# Altium PCB Mis - Coin Battery CR2032.PcbDoc
Units mm, origin at the board's own origin, x right, y up, seen from the top; angles counter-clockwise.
Board outline 31.83 x 27.7 mm, 2 copper layers (Top Layer, Bottom Layer); 3 components, 2 nets, 5 pads, 0 vias.
Unrouted connection lines stored in the file: 1.
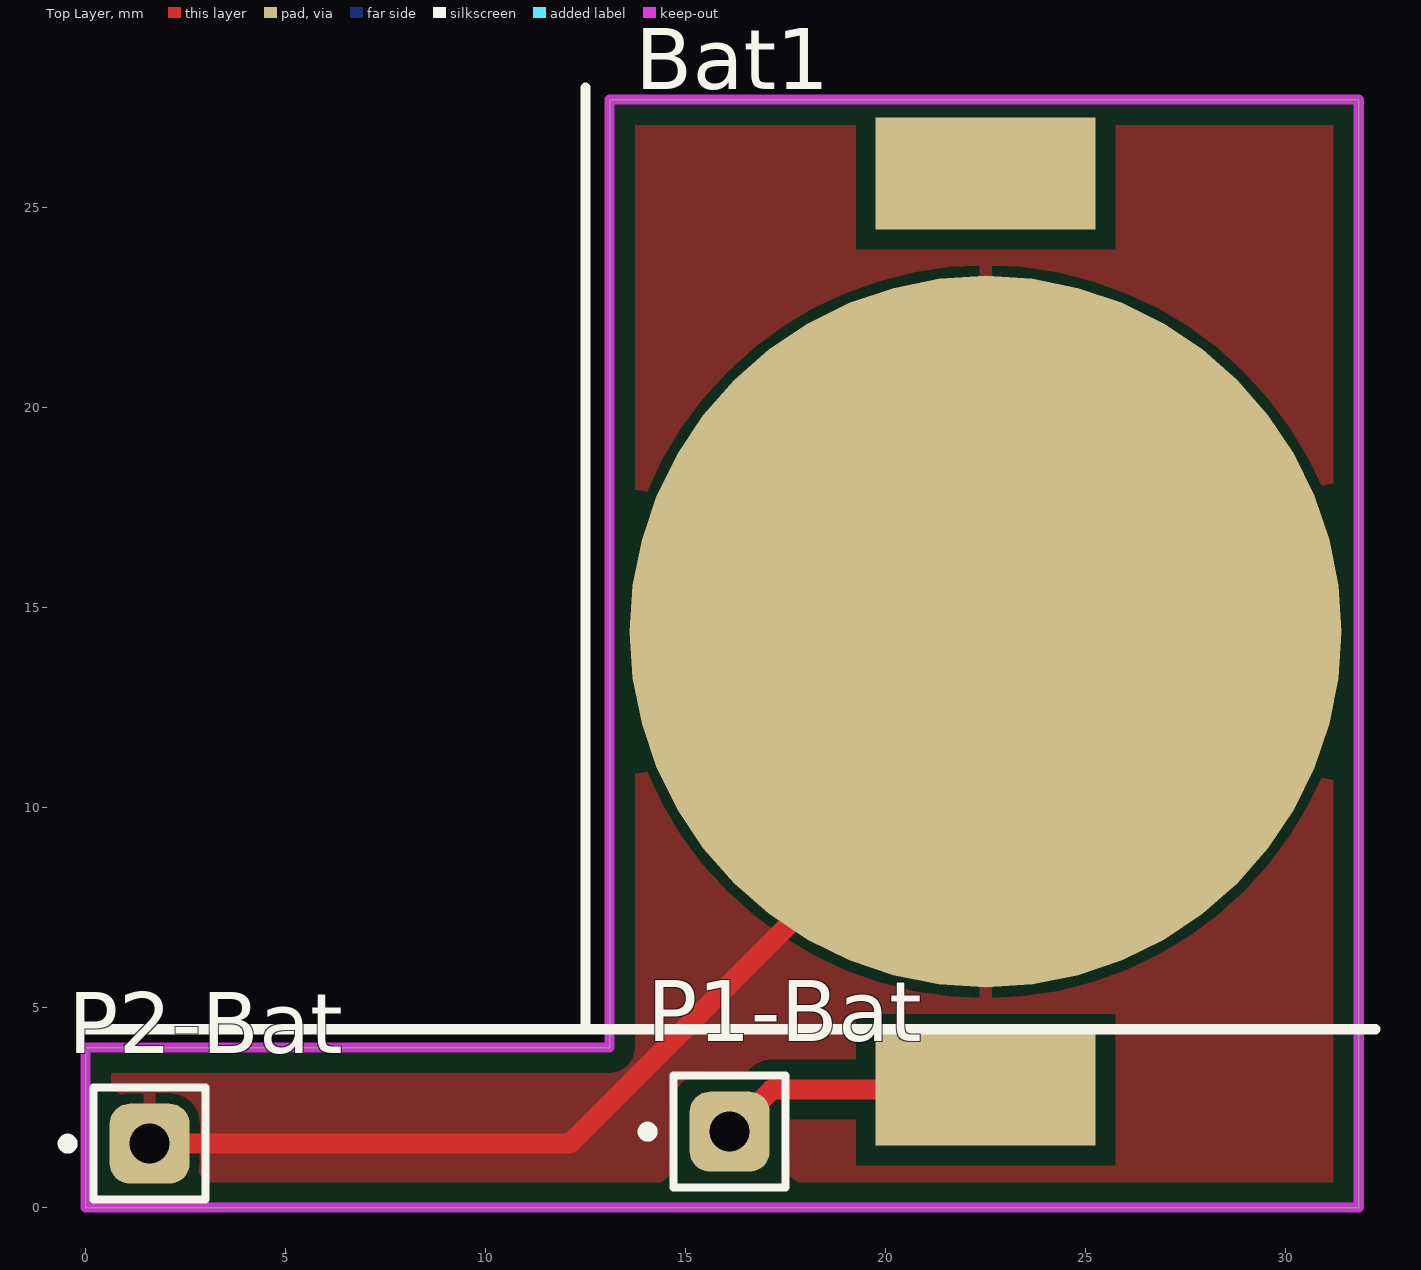
[diagram p0: Top Layer view]
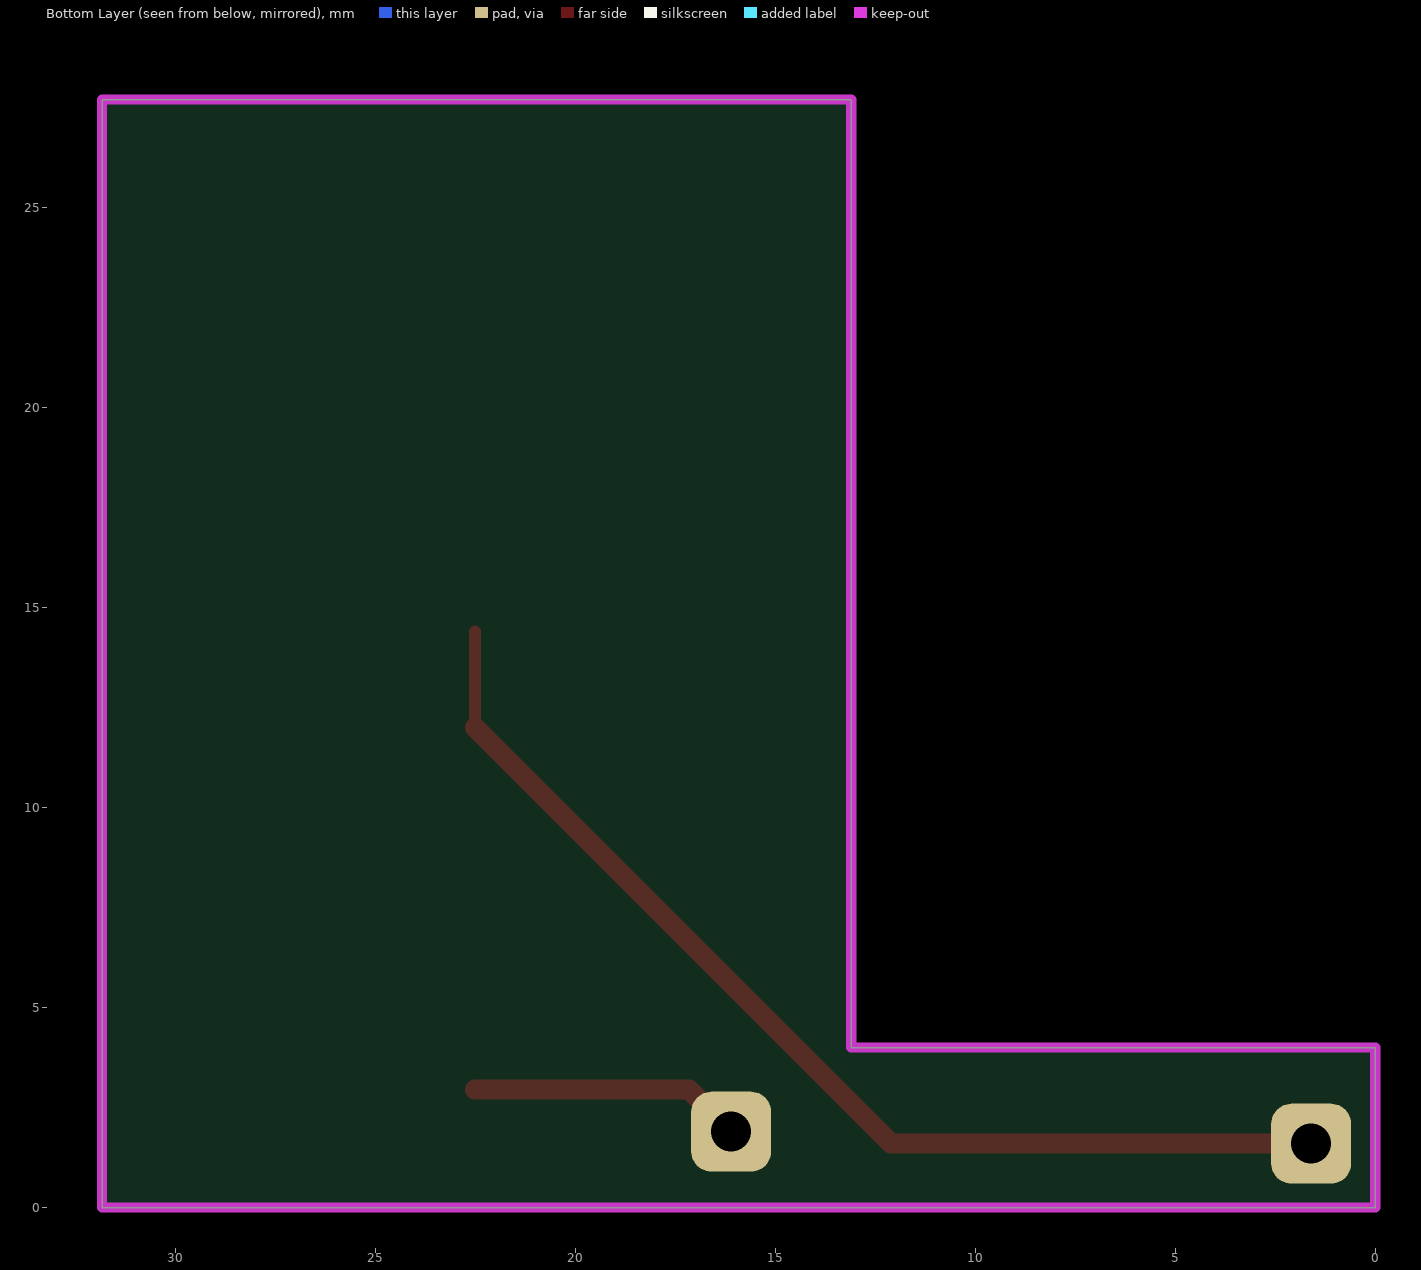
[diagram p1: Bottom Layer view, seen from below]

## Layer stack, top to bottom
Top Layer: signal copper 0.0356
Dielectric: dielectric 0.32, FR-4, Dk 4.8
Bottom Layer: signal copper 0.0356

## Board outline
0,0 0,4 13.1,4 13.1,27.7 31.828,27.7 31.828,0

## Design rules (kind name [scope] priority, off if disabled: settings)
Clearance [All] p1: gap=0.3
PlaneConnect [All] p1: planeconnectstyle=Relief reliefexpansion=0.5 reliefentries=4 reliefconductorwidth=0.3 reliefairgap=0.25
PolygonConnect [All] p1: connectstyle=Relief reliefconductorwidth=0.3 reliefentries=4 polygonreliefangle="90 Angle" airgapwidth=0.25
RoutingVias [All] p1: holewidth=0.7 width=1.5 viastyle="Through Hole" minholewidth=0.5 minwidth=1.2 maxholewidth=1 maxwidth=2
SolderMaskExpansion [All] p1: expansion=0.102
Width [All] p1: maxlimit=5 minlimit=0.3 preferedwidth=0.5 minimp=50.000000 maximp=50.000000 favimp=50.000000
27 further rules are at their usual default settings.

## Components (designator, comment, footprint, x,y, rotation, side; value= is the part's Value field where it differs from the comment)
Bat1 "Battery" "CR2032 Coin Holder" 22.5,14.4 r90 top
P1-Bat "Plug" PIN1 16.1,1.9 r90 top locked
P2-Bat "Plug" PIN1 1.6,1.6 r90 top locked

## Footprints (in the part's own frame and the unit in brackets; to place one, negate y for a bottom-side part, rotate by r counter-clockwise, add the part's x,y. Pads: shape width x height; smd on the part's side, far side on the other; paste and mask are expansions set on the pad)
"CR2032 Coin Holder" [mm] "Coin Battery Holder - CR2032"
  rect 2.8x5.5 smd: 1(-11.45,0) 1(11.45,0)
  round 17.8 smd: 2(0,0)
PIN1 [mm] "Connector; Plug"
  rrect50% 2x2 hole 1: 1(0,0)
  silkscreen extent -1.4,-1.4 1.4,2.17

## Part data
Bat1: "Multicell Battery"

## Nets (pads, with @x,y where several pads share a name; then routed paths per layer and width w, separated by ;. In a path a pad name is that pad's centre, name@x,y a point inside that pad or via, vN(x,y) a via of type N, cw(c..) or ccw(c..) an arc to the next point about the centre after c; other vN are vias at no path point)
V+: Bat1.1 P1-Bat.1 | length 6.8
  Top Layer w0.5: P1-Bat.1 17.15,2.95 Bat1.1@22.5,2.95
V-: Bat1.2 P2-Bat.1 | length 27.6
  Top Layer w0.3: Bat1.2@22.5,12 Bat1.2
  Top Layer w0.5: P2-Bat.1 12.1,1.6 Bat1.2@22.5,12

## Polygon pours and split planes (outlines as drawn)
V- on Top Layer "Bottom Layer-No Net" (solid, pour order 5): 12.5,27.56 31.828,27.56 31.828,0 0,0 0,4 12.5,4

## Keep-outs
Keep-Out Layer:
  the board outline again, w0.254

## Silkscreen, mask and mechanical layers (free items; w line width, h text height)
Top Overlay:
  lines w0.254: 0,4.46 32.239,4.46 ; 12.5,4.5 12.5,28